# Altium PCB PCB1_1.pcbdoc (part 1 of 2)
Units mil, origin at the board's own origin, x right, y up, seen from the top; angles counter-clockwise.
Board outline 4397.5 x 3275 mil, 2 copper layers (Top Layer, Bottom Layer); 53 components, 83 nets, 273 pads, 69 vias.
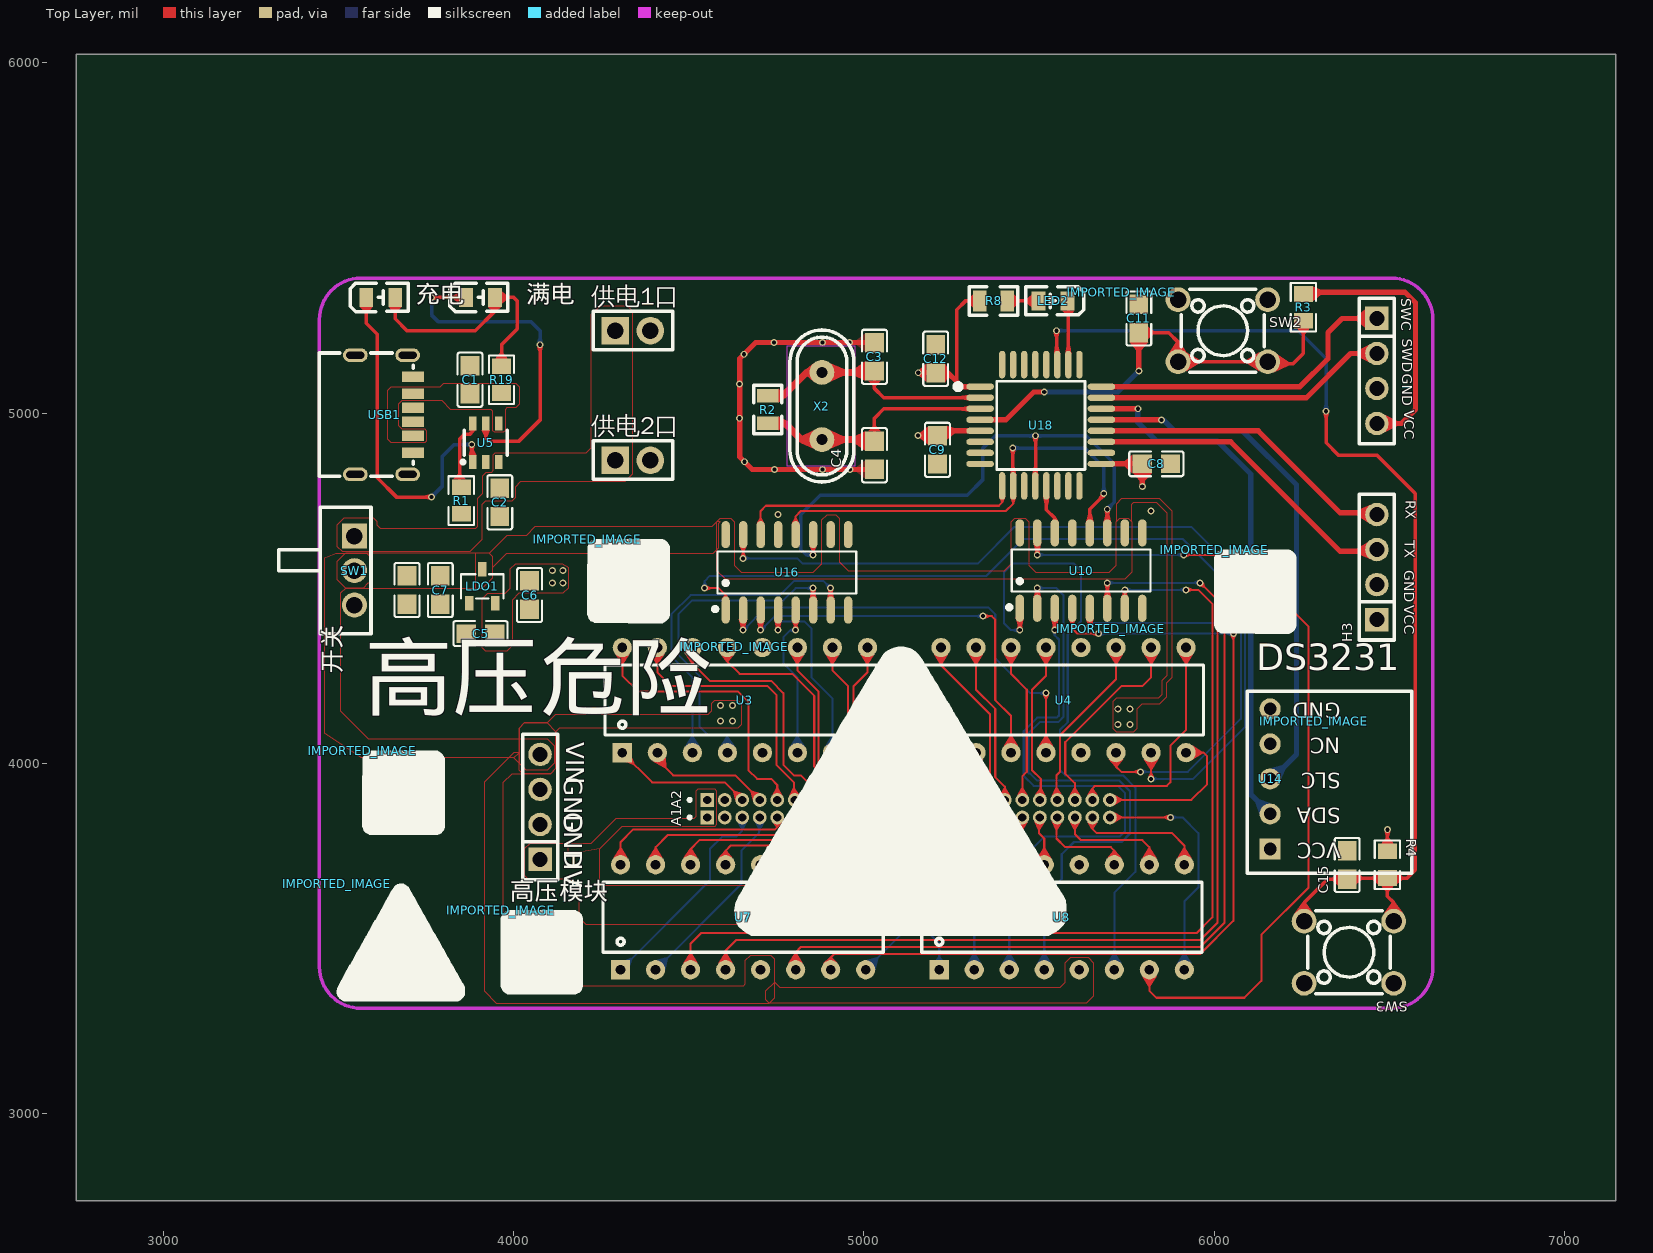
[diagram p0: Top Layer view]
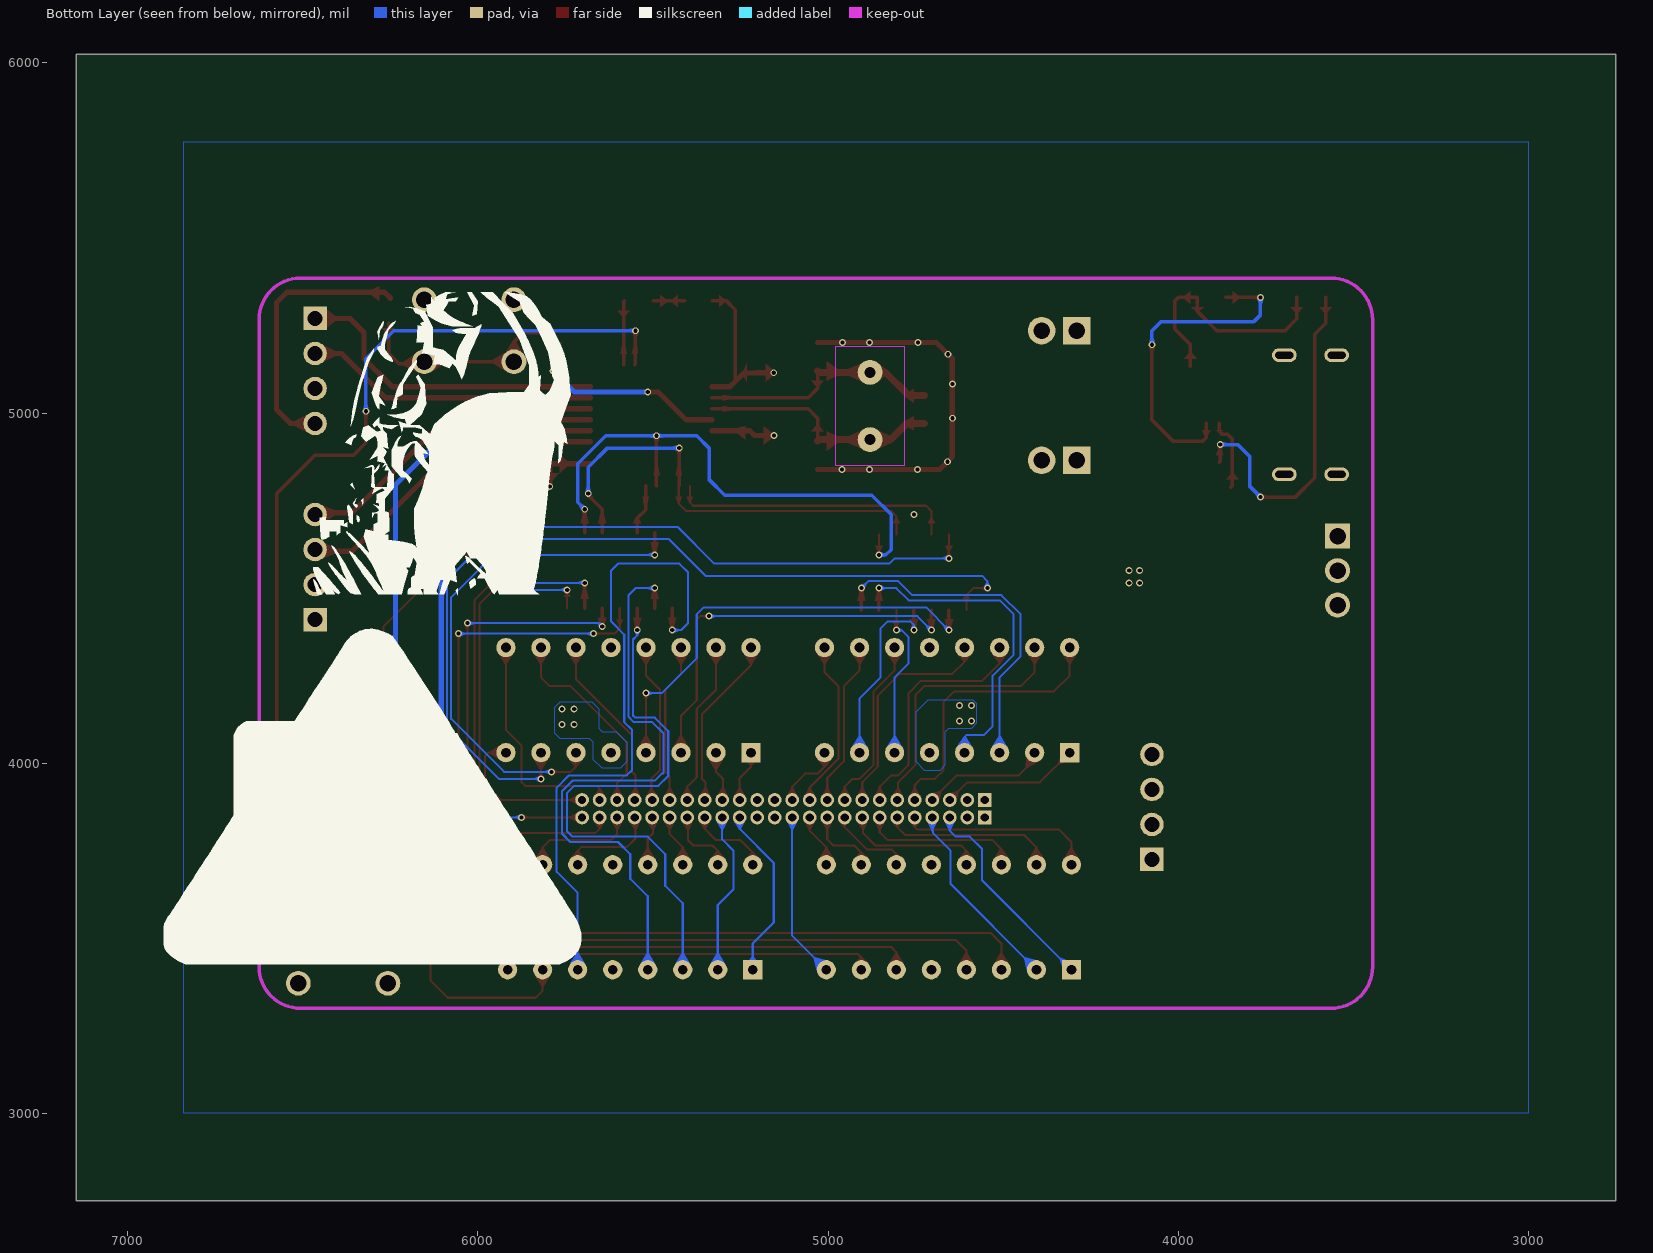
[diagram p1: Bottom Layer view, seen from below]

## Layer stack, top to bottom
Top Layer: signal copper (thickness not stored)
Dielectric: dielectric 12.6, FR-4, Dk 4.8
Bottom Layer: signal copper (thickness not stored)

## Board outline
7147.5,2750 2750,2750 2750,6025 7147.5,6025

## Components (designator, comment, footprint, x,y, rotation, side; value= is the part's Value field where it differs from the comment)
A1 "1.27*24Pin" 1.27*24PIN_MYSELF 4552.43,3845 r90 top
A2 "1.27*24Pin" 1.27*24PIN_MYSELF 4552.43,3895 r90 top
C1 "0805B106K100NT" C0805 3875,5095 r90 top
C2 "0805B106K100NT" C0805 3960,4745 r270 top
C3 "CC0805JRNPO9BN220" C0805 5030,5160.6 r270 top
C4 "CC0805JRNPO9BN220" C0805 5030,4879.4 r90 top
C5 "CC0805KKX5R8BB475" C0805 3905,4370 r0 top
C6 "TCC0805X7R104K250DTS" C0805 4045,4480 r90 top
C7 "TCC0805X7R104K250DTS" C0805 3790,4494.4 r90 top
C8 "GRM033C81E104KE14D" C0805 5835,4855 r0 top
C9 "GRM033C81E104KE14D" C0805 5210,4895 r270 top
C11 "100nF" C0805 5785,5270 r270 top
C12 "GRM033C81E104KE14D" C0805 5205,5155 r90 top
C15 "GRM033C81E104KE14D" C0805 6380,3709.4 r90 top
H3 "HDR-F_2.54_1x4P" HDR-TH_4P-P2.54-V-F 6465,4560 r90 top
IMPORTED_IMAGE "IMPORTED_IMAGE" IMPORTED_IMAGE 3495,3655 r0 top
IMPORTED_IMAGE "IMPORTED_IMAGE" IMPORTED_IMAGE 4629.57,4332.8 r0 top
IMPORTED_IMAGE "IMPORTED_IMAGE" IMPORTED_IMAGE 5704.46,4383.25 r0 top
IMPORTED_IMAGE "IMPORTED_IMAGE" IMPORTED_IMAGE 4210,4640 r0 top
IMPORTED_IMAGE "IMPORTED_IMAGE" IMPORTED_IMAGE 3567.5,4035 r0 top
IMPORTED_IMAGE "IMPORTED_IMAGE" IMPORTED_IMAGE 3962.5,3580 r0 top
IMPORTED_IMAGE "IMPORTED_IMAGE" IMPORTED_IMAGE 6285,4120 r0 top
IMPORTED_IMAGE "IMPORTED_IMAGE" IMPORTED_IMAGE 6000,4610 r0 top
IMPORTED_IMAGE "IMPORTED_IMAGE" IMPORTED_IMAGE 5735,5345 r0 top
LDO1 "ME6209A33M3G" SOT-23-3_L2.9-W1.6-P1.90-LS2.8-BR 3910,4505 r270 top
LED2 "D21121300350-LED0805" LED0805-R-RD 5540,5320 r180 top
R1 "RC0805FR-0724KL" R0805#1 3850,4750 r270 top
R2 "1MΩ" R0805#2 4725,5010 r90 top
R3 "RC0805FR-0724KL" R0805#1 6255,5302 r90 top
R4 "AR05DTCW1002" R0805#1 6495,3710 r270 top
R8 "1K" R0805#2 5370,5320 r180 top
R19 "RC0805FR-0724KL" R0805#1 3965,5095 r90 top
SW1 "={Manufacturer Part}" SW-TH_K3-1260D-K1 3545,4550 r0 top
SW2 "TC-6610F-5-260G" SW-TH_4P-L6.0-W6.0-P4.50-LS6.5 6025,5235 r0 top
SW3 "TC-6610F-5-260G" SW-TH_4P-L6.0-W6.0-P4.50-LS6.5 6385,3460 r180 top
SWC "HDR-F_2.54_1x4P" HDR-TH_4P-P2.54-V-F 6465,5120 r270 top
U3 "K155ID1/SN74141" DIP16 4310,4030 r0 top
U4 "K155ID1/SN74141" DIP16 5220,4030 r0 top
U5 "TP4059" SOT-23-6_L2.9-W1.6-P0.95-LS2.8-BR 3920,4915 r270 top
U7 "K155ID1/SN74141" DIP16 4305,3410 r0 top
U8 "K155ID1/SN74141" DIP16 5215,3410 r0 top
U10 "74HC595D,118" SOIC-16_L9.9-W3.9-P1.27-LS6.0-BL 5620,4550 r0 top
U14 "DS3231 5P" DS3231 6160,3955 r180 top
U16 "74HC595D,118" SOIC-16_L9.9-W3.9-P1.27-LS6.0-BL 4780,4545 r0 top
U18 "STM32F030K6T6" TQFP-32_L7.0-W7.0-P0.50-BL 5505,4965 r270 top
USB1 "TYPEC-250D-BCP6" USB-C-SMD_TYPEC-250D-BCP6 3630,4995 r270 top
X2 "8M" HC-49US_L11.0-W4.6-P4.88 4880,5020 r90 top
供电1口 "HDR-F_2.54_1x2P" HDR-TH_2P-P2.54-V-F 4340,5235 r0 top
供电2口 "HDR-F_2.54_1x2P" HDR-TH_2P-P2.54-V-F 4340,4865 r0 top
充电 "NCD0805G1" LED0805-R-RD 3620,5330 r0 top
开关 "CL21B106KOQNNNE" C0805 3695,4494.4 r90 top
满电 "NCD0805G1" LED0805-R-RD 3905,5330 r0 top
高压模块 "HDR-F_2.54_1x4P" HDR-TH_4P-P2.54-V-F 4075,3875 r90 top

## Footprints (in the part's own frame and the unit in brackets; to place one, negate y for a bottom-side part, rotate by r counter-clockwise, add the part's x,y. Pads: shape width x height; smd on the part's side, far side on the other; paste and mask are expansions set on the pad)
1.27*24PIN_MYSELF [mm]
  rect 1x1 hole 0.6: 1(0,0)
  round 1 hole 0.6: 2(0,-1.27) 3(0,-2.54) 4(0,-3.81) 5(0,-5.08) 6(0,-6.35) 7(0,-7.62) 8(0,-8.89) 9(0,-10.16) 10(0,-11.43) 11(0,-12.7) 12(0,-13.97) 13(0,-15.24) 14(0,-16.51) 15(0,-17.78) 16(0,-19.05) 17(0,-20.32) 18(0,-21.59) 19(0,-22.86) 20(0,-24.13) 21(0,-25.4) 22(0,-26.67) 23(0,-27.94) 24(0,-29.21)
  silkscreen extent -0.09,1.18 0.09,1.36
C0805 [mm]
  rect 1.41x1.35 smd: 1(-1.03,0) 2(1.03,0)
  silkscreen extent -1.96,-0.9 1.96,0.9
DIP16 [mil]
  rect 55x55 hole 28: 1(0,0)
  round 55 hole 28: 2(100,0) 3(200,0) 4(300,0) 5(400,0) 6(500,0) 7(600,0) 8(700,0) 9(700,300) 10(600,300) 11(500,300) 12(400,300) 13(300,300) 14(200,300) 15(100,300) 16(0,300)
  silkscreen extent -50,50 750,250
DS3231 [mil]
  rect 60x60 hole 36: 1(0,200)
  round 60 hole 36: 2(0,100) 3(0,0) 4(0,-100) 5(0,-200)
  silkscreen extent -405,-250 65,270
HC-49US_L11.0-W4.6-P4.88 [mm]
  round 1.8 hole 0.8: 1(-2.44,0) 2(2.44,0)
  silkscreen extent -5.51,-2.32 5.51,2.32
HDR-TH_2P-P2.54-V-F [mm]
  rect 2x2 hole 1.2: 1(-1.27,0)
  round 2 hole 1.2: 2(1.27,0)
  silkscreen extent -2.88,-1.39 2.88,1.4
HDR-TH_4P-P2.54-V-F [mm]
  rect 1.7x1.7 hole 1.1: 1(-3.81,0)
  round 1.7 hole 1.1: 2(-1.27,0) 3(1.27,0) 4(3.81,0)
  silkscreen extent -5.29,-1.27 5.29,1.27
IMPORTED_IMAGE [mil]
  silkscreen extent 0,-335 365,1
LED0805-R-RD [mm]
  rect 1x1.4 smd: 1(1.05,0) 2(-1.05,0)
  silkscreen extent -2.22,-1.04 1.99,1.01
R0805#1 [mil]
  rect 44.6x54.2 smd: 1(-38,0) 2(38,0)
  silkscreen extent -69,-36 69,36
R0805#2 [mil]
  rect 39.37x61.02 smd: 1(-39.37,0) 2(39.37,0)
  silkscreen extent -69,-40 69,40
SOIC-16_L9.9-W3.9-P1.27-LS6.0-BL [mil]
  oval 23.7x77.6 smd: 1(-175,-107.7) 2(-125,-107.7) 3(-75,-107.7) 4(-25,-107.7) 5(25,-107.7) 6(75,-107.7) 7(125,-107.7) 8(175,-107.7) 9(175,107.7) 10(125,107.7) 11(75,107.7) 12(25,107.7) 13(-25,107.7) 14(-75,107.7) 15(-125,107.7) 16(-175,107.7)
  silkscreen extent -211,-111 198,60
SOT-23-3_L2.9-W1.6-P1.90-LS2.8-BR [mm]
  rect 1.07x0.6 smd: 1(1.235,-0.95) 2(1.235,0.95) 3(-1.235,0)
  silkscreen extent -0.88,-1.54 0.88,1.54
SOT-23-6_L2.9-W1.6-P0.95-LS2.8-BR [mm]
  rect 1x0.55 smd: 1(1.4,-0.95) 2(1.4,0) 3(1.4,0.95) 4(-1.4,0.95) 5(-1.4,0) 6(-1.4,-0.95)
  silkscreen extent -0.9,-1.78 1.52,1.55
SW-TH_4P-L6.0-W6.0-P4.50-LS6.5 [mm]
  round 1.8 hole 1.2: 1(-3.25,2.25) 2(3.25,2.25) 3(-3.25,-2.25) 4(3.25,-2.25)
  silkscreen extent -3,-3 3,3
SW-TH_K3-1260D-K1 [mil]
  rect 70.9x70.9 hole 47.2: 1(0,98.4)
  round 70.9 hole 47.2: 2(0,0) 3(0,-98.4)
  silkscreen extent -216,-181 47,181
TQFP-32_L7.0-W7.0-P0.50-BL [mm]
  oval 0.45x2 smd: 1(-2.8,-4.4) 2(-2,-4.4) 3(-1.2,-4.4) 4(-0.4,-4.4) 5(0.4,-4.4) 6(1.2,-4.4) 7(2,-4.4) 8(2.8,-4.4) 17(2.8,4.4) 18(2,4.4) 19(1.2,4.4) 20(0.4,4.4) 21(-0.4,4.4) 22(-1.2,4.4) 23(-2,4.4) 24(-2.8,4.4)
  oval 2x0.45 smd: 9(4.4,-2.8) 10(4.4,-2) 11(4.4,-1.2) 12(4.4,-0.4) 13(4.4,0.4) 14(4.4,1.2) 15(4.4,2) 16(4.4,2.8) 25(-4.4,2.8) 26(-4.4,2) 27(-4.4,1.2) 28(-4.4,0.4) 29(-4.4,-0.4) 30(-4.4,-1.2) 31(-4.4,-2) 32(-4.4,-2.8)
  silkscreen extent -3.2,-6.2 3.2,3.2
USB-C-SMD_TYPEC-250D-BCP6 [mm]
  oval 1x1.8 hole 0.5 slot 1.3 at 90 deg: 1(-4.32,1.7) 2(-4.32,-2.1) 3(4.32,-2.1) 4(4.32,1.7)
  rect 0.75x1.6 smd: A5(-0.5,2.1) A9(1.52,2.1) A12(2.75,2.1) B5(0.5,2.1) B9(-1.52,2.1) B12(-2.75,2.1)
  silkscreen extent -4.48,-4.7 4.47,2.1

## Via types
v1: diameter 19.68, hole 11.81, Top Layer to Bottom Layer, 69 vias

## Nets (pads, with @x,y where several pads share a name; then routed paths per layer and width w, separated by ;. In a path a pad name is that pad's centre, name@x,y a point inside that pad or via, vN(x,y) a via of type N, cw(c..) or ccw(c..) an arc to the next point about the centre after c; other vN are vias at no path point)
1_0: A1.8 U7.13 | length 401.7
  Top Layer w6: U7.13@4605,3710 4605,3750 4620,3765 4865,3765 4900,3800 4900,3842.57 A1.8@4902.43,3845
1_1: A1.3 U7.1 | length 602.3
  Bottom Layer w6: U7.1@4305,3410 4560,3665 4560,3755 4595,3790 4635,3790 4652.43,3807.43 A1.3@4652.43,3845
1_2: A1.4 U7.2 | length 558.2
  Bottom Layer w6: U7.2@4405,3410 4650,3655 4650,3750 4700,3800 4700,3805 4702.43,3807.43 A1.4@4702.43,3845
1_3: A1.5 U7.16 | length 557.6
  Top Layer w6: U7.16@4305,3710 4305,3775 4340,3810 4745,3810 4752.43,3817.43 A1.5@4752.43,3845
1_4: A1.6 U7.15 | length 498.8
  Top Layer w6: U7.15@4405,3710 4405,3760 4440,3795 4780,3795 4802.43,3817.43 A1.6@4802.43,3845
1_5: A1.7 U7.14 | length 454.6
  Top Layer w6: U7.14@4505,3710 4505,3755 4530,3780 4830,3780 4852.43,3802.43 A1.7@4852.43,3845
1_6: A1.12 U7.8 | length 475.4
  Bottom Layer w6: U7.8@5005,3410 5102.43,3507.43 A1.12@5102.43,3845
1_7: A1.11 U7.9 | length 154.6
  Top Layer w6: U7.9@5005,3710 5005,3760 5052.43,3807.43 A1.11@5052.43,3845
1_8: A1.10 U7.10 | length 210.5
  Top Layer w6: U7.10@4905,3710 4905,3745 4925,3765 4985,3765 5002.43,3782.43 A1.10@5002.43,3845
1_9: A1.9 U7.11 | length 239.2
  Top Layer w6: U7.11@4805,3710 4805,3740 4818,3753 4888,3753 4955,3820 4955,3842.43 A1.9@4952.43,3845
1A: U7.3 U10.7 | length 2810.3
  Top Layer w6: U7.3@4505,3410 4505,3485 4535,3515 5950,3515 5995,3560 5995,4455 5955,4495 v1(5920,4495) ; U10.7@5745,4442.3 v1(5745,4495)
  Bottom Layer w6: v1(5745,4495) v1(5920,4495)
1B: U7.6 U10.5 | length 2606.7
  Top Layer w6: U7.6@4805,3410 4805,3460 4820,3475 5960,3475 6030,3545 v1(6030,4400)
  Top Layer w10: v1(5645,4390) U10.5@5645,4442.3
  Bottom Layer w6: v1(5645,4390) 5655,4400 v1(6030,4400)
1C: U7.7 U10.4 | length 2572
  Top Layer w6: U7.7@4905,3410 4905,3445 4915,3455 5960,3455 6055,3550 v1(6055,4370) ; U10.4@5595,4442.3 5595,4385 5610,4370 v1(5670,4370)
  Bottom Layer w6: v1(5670,4370) v1(6055,4370)
1D: U7.4 U10.6 | length 2821.5
  Top Layer w6: U7.4@4605,3410 4605,3465 4635,3495 5960,3495 6010,3545 6010,4465 v1(5960,4515) v1@5955,4515
  Top Layer w10: U10.6@5695,4442.3 v1(5695,4515)
  Bottom Layer w6: v1(5695,4515) v1@5955,4515
2_0: A1.20 U8.13 | length 142.2
  Top Layer w6: A1.20@5502.43,3845 5500,3842.57 5500,3800 5515,3785 U8.13@5515,3710
2_1: A1.15 U8.1 | length 500.2
  Bottom Layer w6: U8.1@5215,3410 5215,3485 5155,3545 5155,3715 5252.43,3812.43 A1.15@5252.43,3845
2_2: A1.16 U8.2 | length 467.1
  Bottom Layer w6: A1.16@5302.43,3845 5302.43,3782.43 5270,3750 5270,3640 5315,3595 U8.2@5315,3410
2_3: A1.17 U8.16 | length 232.9
  Top Layer w6: U8.16@5215,3710 5215,3745 5250,3780 5320,3780 5352.43,3812.43 A1.17@5352.43,3845
2_4: A1.18 U8.15 | length 203.4
  Top Layer w6: U8.15@5315,3710 5315,3750 5330,3765 5385,3765 5400,3780 5400,3842.57 A1.18@5402.43,3845
2_5: A1.19 U8.14 | length 150.5
  Top Layer w6: U8.14@5415,3710 5415,3760 5452.43,3797.43 A1.19@5452.43,3845
2_6: A1.24 U8.8 | length 677.8
  Top Layer w6: A1.24@5702.43,3845 v1(5875,3845)
  Bottom Layer w6: v1(5875,3845) 5910,3845 5955,3800 5955,3645 5915,3605 U8.8@5915,3410
2_7: A1.23 U8.9 | length 369.7
  Top Layer w6: A1.23@5652.43,3845 5652.43,3812.57 5665,3800 5880,3800 5915,3765 U8.9@5915,3710
2_8: A1.22 U8.10 | length 325.6
  Top Layer w6: A1.22@5602.43,3845 5602.43,3797.57 5620,3780 5795,3780 5815,3760 U8.10@5815,3710
2_9: A1.21 U8.11 | length 280.5
  Top Layer w6: A1.21@5552.43,3845 5550,3842.57 5550,3785 5575,3760 5705,3760 5715,3750 U8.11@5715,3710
2A: U8.3 U10.3 | length 1634.4
  Top Layer w10: v1(5545,4380) U10.3@5545,4442.3
  Bottom Layer w6: U8.3@5415,3410 5415,3600 5465,3650 5465,3740 5515,3790 5730,3790 5745,3805 5745,3915 5725,3935 5485,3935 5456.5,3963.5 5456.5,4091.5 5495,4130 5551,4130 5557,4136 5557,4353 5545,4365 v1(5545,4380)
2B: U8.6 U10.1 | length 1874.6
  Top Layer w10: v1(5445,4380) U10.1@5445,4442.3
  Bottom Layer w6: v1(5445,4380) 5420,4380 5400,4400 5400,4545 5425,4570 5600,4570 5620,4550 5620,4405 5582,4367 5582,4117 5560,4095 5560,3980 5575,3965 5740,3965 5775,3930 5775,3690 5715,3630 U8.6@5715,3410
2C: U8.7 U10.15 | length 2398.4
  Top Layer w6: U8.7@5815,3410 5815,3350 5835,3330 6086.41,3330 6135,3378.59 6135,3510 6270,3645 6270,4390 6065,4595 v1@5910,4595
  Top Layer w10: v1(5495,4595) U10.15@5495,4657.7
  Bottom Layer w6: v1(5495,4595) v1@5910,4595
  other v1: 5913.39,4595
2D: U8.4 U10.2 | length 1725.3
  Top Layer w10: U10.2@5495,4442.3 v1(5495,4500)
  Bottom Layer w6: v1(5495,4500) 5550,4500 5570,4480 5570,4132.03 5555.97,4118 5503,4118 5470,4085 5470,3970 5475,3970 5495,3950 5730,3950 5760,3920 5760,3799 5736,3775 5600,3775 5565,3740 5565,3670 5515,3620 U8.4@5515,3410
3_0: A2.8 U3.13 | length 644
  Top Layer w6: U3.13@4610,4330 4610,4290 4645,4255 4795,4255 4858,4192 4858,3990.03 4902.43,3945.6 A2.8@4902.43,3895
3_1: A2.3 U3.1 | length 398.3
  Top Layer w6: U3.1@4310,4030 4395,3945 4602.43,3945 A2.3@4652.43,3895
3_2: A2.4 U3.2 | length 360.1
  Top Layer w6: U3.2@4410,4030 4410,4010 4455,3965 4632.43,3965 A2.4@4702.43,3895
3_3: A2.5 U3.16 | length 808.6
  Top Layer w6: U3.16@4310,4330 4310,4250 4355,4205 4640,4205 4670,4175 4670,3980 4695,3955 4735,3955 4752.43,3937.57 A2.5@4752.43,3895
3_4: A2.6 U3.15 | length 758.6
  Top Layer w6: U3.15@4410,4330 4410,4260 4450,4220 4725,4220 4750,4195 4750,3995 4800,3945 4800,3897.43 A2.6@4802.43,3895
3_5: A2.7 U3.14 | length 691.1
  Top Layer w6: U3.14@4510,4330 4510,4285 4560,4235 4735,4235 4770,4200 4770,3995 4800,3965 4820,3965 4852.43,3932.57 A2.7@4852.43,3895
3_6: A2.12 U3.8 | length 193.8
  Top Layer w6: U3.8@5010,4030 5010,3990 5030,3970 5065,3970 5102.43,3932.57 A2.12@5102.43,3895
3_7: A2.11 U3.9 | length 485.7
  Top Layer w6: U3.9@5010,4330 5010,4260 4970,4220 4970,4013.03 5052.43,3930.6 A2.11@5052.43,3895
3_8: A2.10 U3.10 | length 473.3
  Top Layer w6: U3.10@4910,4330 4910,4265 4955,4220 4955,4005 5002.43,3957.57 A2.10@5002.43,3895
3_9: A2.9 U3.11 | length 505.7
  Top Layer w6: U3.11@4810,4330 4810,4265 4870,4205 4870,3995 4910,3955 4930,3955 4952.43,3932.57 A2.9@4952.43,3895
3A: U3.3 U16.7 | length 985.2
  Top Layer w10: U16.7@4905,4437.3 v1(4905,4500)
  Bottom Layer w6: U3.3@4510,4030 4510,4245 4450,4305 4450,4425 4505,4480 4760,4480 4800,4520 4885,4520 v1(4905,4500)
3B: U3.6 U16.5 | length 447.2
  Top Layer w6: v1(4805,4380) U16.5@4805,4437.3
  Bottom Layer w6: v1(4805,4380) 4790,4380 4770,4360 4770,4285 4810,4245 U3.6@4810,4030
3C: U3.7 U16.4 | length 559.6
  Top Layer w10: v1(4755,4380) U16.4@4755,4437.3
  Bottom Layer w6: v1(4755,4380) 4755,4395 4765,4405 4830,4405 4850,4385 4850,4245 4910,4185 U3.7@4910,4030
3D: U3.4 U16.6 | length 961
  Top Layer w10: U16.6@4855,4437.3 v1(4855,4500)
  Bottom Layer w6: U3.4@4610,4030 4610,4075 4605,4080 4555,4080 4530,4105 4530,4250 4470,4310 4470,4425 4510,4465 4770,4465 4805,4500 v1(4855,4500)
4_0: A2.20 U4.13 | length 463
  Top Layer w6: A2.20@5502.43,3895 5505,3897.57 5505,3955 5480,3980 5480,4210 5520,4250 U4.13@5520,4330
4_1: A2.15 U4.1 | length 148.4
  Top Layer w6: U4.1@5220,4030 5220,3990 5252.43,3957.57 A2.15@5252.43,3895
4_2: A2.16 U4.2 | length 144.3
  Top Layer w6: A2.16@5302.43,3895 5300,3897.43 5300,3955 5320,3975 U4.2@5320,4030
4_3: A2.17 U4.16 | length 498.1
  Top Layer w6: U4.16@5220,4330 5220,4280 5360,4140 5360,3955 5350,3945 5350,3897.43 A2.17@5352.43,3895
4_4: A2.18 U4.15 | length 469.1
  Top Layer w6: U4.15@5320,4330 5320,4210 5375,4155 5375,3960 5402.43,3932.57 A2.18@5402.43,3895
4_5: A2.19 U4.14 | length 458.8
  Top Layer w6: U4.14@5420,4330 5420,4255 5465,4210 5465,3975 5452.43,3962.43 A2.19@5452.43,3895
4_6: A2.24 U4.8 | length 440.4
  Top Layer w6: A2.24@5702.43,3895 5935,3895 5980,3940 5980,4020 5970,4030 U4.8@5920,4030
4_7: A2.23 U4.9 | length 665.9
  Top Layer w6: A2.23@5652.43,3895 5652.43,3927.43 5660,3935 5865,3935 5875,3945 5875,4050 5920,4095 U4.9@5920,4330
4_8: A2.22 U4.10 | length 583
  Top Layer w6: A2.22@5602.43,3895 5602.43,3942.57 5575,3970 5575,4060 5735,4220 5795,4220 5820,4245 U4.10@5820,4330
4_9: A2.21 U4.11 | length 506.4
  Top Layer w6: A2.21@5552.43,3895 5550,3897.43 5550,3965 5560,3975 5560,4080 5720,4240 U4.11@5720,4330
4A: U4.3 U16.3 | length 1146.7
  Top Layer w6: v1(5340,4420) 5365,4420 5375,4410 5375,4180 5420,4135 U4.3@5420,4030
  Top Layer w10: v1(4705,4380) U16.3@4705,4437.3
  Bottom Layer w6: v1(4705,4380) 4745,4420 v1(5340,4420)
4B: U4.6 U16.1 | length 2593.6
  Top Layer w6: v1(4545,4500) 4585,4500 4605,4480 U16.1@4605,4437.3 ; U4.6@5720,4030 5720,3990 5735,3975 v1(5790,3975)
  Bottom Layer w6: v1(4545,4500) 4545,4520 4560,4535 5350,4535 5455,4640 5910,4640 6076.5,4473.5 6076.5,4126.5 5925,3975 v1(5790,3975)
4C: U4.7 U16.15 | length 2437.5
  Top Layer w6: v1(4655,4585) U16.15@4655,4652.7 ; v1(5820,3955) U4.7@5820,4030
  Bottom Layer w6: v1(4655,4585) 4810,4585 4825,4570 5325,4570 5430,4675 5935,4675 6088.5,4521.5 6088.5,4103.5 5940,3955 v1(5820,3955)
4D: U4.4 U16.2 | length 1293.9
  Top Layer w6: U4.4@5520,4030 v1(5520,4200)
  Top Layer w10: v1(4655,4380) U16.2@4655,4437.3
  Bottom Layer w6: v1(4655,4380) 4720,4445 5355,4445 5375,4425 5375,4300 5475,4200 v1(5520,4200)
$1N3546: LED2.1 R8.1 | length 89.3
  Top Layer w10: R8.1@5409.37,5320 LED2.1@5498.65,5320
$1N5238: C2.1 SW1.1 U5.3 供电1口.1 供电2口.1
$1N5239: R1.1 U5.6 | length 208.6
  Top Layer w10: R1.1@3850,4788 3845,4793 3845,4925 3860,4940 3875,4940 3882.6,4947.6 U5.6@3882.6,4970.12
$1N5242: U5.5 满电.2 | length 956.4
  Top Layer w10: v1(3765,5330) 满电.2@3863.65,5330 ; U5.5@3920,4970.12 3920,4930 3930,4920 4015,4920 4075,4980 v1(4075,5195)
  Bottom Layer w10: v1(3765,5330) 3765,5280 3785,5260 4050,5260 4075,5235 v1(4075,5195)
$1N5243: R19.2 充电.1 满电.1 | length 695.7
  Top Layer w10: 充电.1@3661.35,5330 3661.35,5268.65 3695,5235 3890,5235 3945,5290 3945,5328.65 满电.1@3946.35,5330 4000,5330 4010,5320 4010,5240 3965,5195 R19.2@3965,5133
$1N5248: U5.1 充电.2 | length 983.9
  Top Layer w10: 充电.2@3578.65,5330 3578.65,5256.35 3610,5225 3610,4815 3665,4760 v1(3765,4760) ; v1(3880,4910) 3880,4862.49 U5.1@3882.6,4859.89
  Bottom Layer w10: v1(3765,4760) 3795,4790 3795,4875 3830,4910 v1(3880,4910)
+5V: C7.2 LDO1.3 SW1.2 U3.5 U4.5 U7.5 U8.5 U10.10 U10.16 U16.10 U16.16 开关.2 高压模块.4
  other v1: 5725,4110 5760,4110 4590,4120 4625,4120 5725,4155 5760,4155 4590,4165 4625,4165
APA3/SER2: U16.14 U18.9 | length 814.3
  Top Layer w6: U16.14@4705,4652.7 4705,4720 4720,4735 5385,4735 5394.76,4744.76 U18.9@5394.76,4791.77
APA4/SHCP: U10.11 U16.11 U18.12 | length 1622.1
  Top Layer w6: v1(4855,4595) U16.11@4855,4652.7
  Top Layer w10: U18.12@5489.25,4791.77 5490,4792.52 v1@5490,4935 ; U10.11@5695,4657.7 v1(5695,4725)
  Bottom Layer w10: v1(4855,4595) 4835,4595 4820,4610 4820,4710 4875,4765 5295,4765 5340,4810 5340,4900 5375,4935 v1(5489.5,4935) 5635,4935 5715,4855 5715,4745 v1(5695,4725)
APA6/STCP: U10.12 U16.12 U18.10 | length 1334.5
  Top Layer w6: U16.12@4805,4652.7 4805,4705 4820,4720 5405,4720 5426.26,4741.26 U18.10@5426.26,4791.77
  Top Layer w10: v1(5425,4900) 5425,4793.03 U18.10@5426.26,4791.77 ; U10.12@5645,4657.7 5645,4725 5685,4765 v1(5685,4770)
  Bottom Layer w10: v1(5425,4900) 5630,4900 5685,4845 v1(5685,4770)
APA7/SER1: U10.14 U18.13 | length 144.1
  Top Layer w10: U18.13@5520.75,4791.77 5520.75,4724.25 5545,4700 U10.14@5545,4657.7
GND: A1.2 A1.13 A2.2 A2.13 C1.2 C2.2 C3.1 C4.1 C5.1 C6.1 C7.1 C8.2 C9.2 C11.1 C12.2 C15.2 H3.2 LDO1.1 R1.2 SW2.1 SW2.2 SW3.1 SW3.2 SWC.3 U3.12 U4.12 U5.2 U7.12 U8.12 U10.8 U10.13 U14.5 U16.8 U16.13 U18.16 U18.32 USB1.1 USB1.2 USB1.3 USB1.4 USB1.A12 USB1.B12 供电1口.2 供电2口.2 开关.1 高压模块.2 高压模块.3 | length 1084
  Top Layer w15: C4.1@5030,4838.9 v1(4959.75,4838.9) v1(4881.92,4838.9) v1(4744.17,4838.9) 4681.1,4838.9 v1(4659.07,4860.93) 4645,4875 v1(4645,4985) v1(4645,5083) 4645,5155 v1(4657.81,5167.81) 4691.1,5201.1 v1(4743.39,5201.1) v1(4881.14,5201.1) v1(4958.97,5201.1) C3.1@5030,5201.1
  other v1: 4755,4710 5820,4720
HV: A1.1 A1.14 A2.1 A2.14 高压模块.1
PA9/TX: H3.3 U18.19 | length 918.4
  Top Layer w15: U18.19@5678.23,4917.76 6047.24,4917.76 6360,4605 6460,4605 H3.3@6465,4610
PA10/RX: H3.4 U18.20 | length 885.9
  Top Layer w15: U18.20@5678.23,4949.25 6125.75,4949.25 6360,4715 6460,4715 H3.4@6465,4710
PA11/SCL: U14.3 U18.21 | length 1509.8
  Top Layer w15: U18.21@5678.23,4980.75 5849.25,4980.75 v1(5850,4980)
  Bottom Layer w15: v1(5850,4980) 5855,4980 5885,4950 6080,4950 6235,4795 6235,4025 U14.3@6160,3950
PA12/SDA: U14.2 U18.22 | length 1520.2
  Top Layer w15: U18.22@5678.23,5012.24 v1(5782.24,5012.24)
  Bottom Layer w15: v1(5782.24,5012.24) 5782.24,4972.76 5835,4920 6010,4920 6105,4825 6105,3910 U14.2@6160,3855
PA13/SWD: SWC.2 U18.23 | length 839.1
  Top Layer w15: U18.23@5678.23,5043.74 6263.74,5043.74 6390,5170 SWC.2@6465,5170
PA14/SWC: SWC.1 U18.24 | length 911.4
  Top Layer w15: U18.24@5678.23,5075.24 6245.24,5075.24 6325,5155 6325,5230 6365,5270 SWC.1@6465,5270
PB3/LED: LED2.2 U18.26 | length 182.8
  Top Layer w10: LED2.2@5581.35,5320 5583.74,5317.61 U18.26@5583.74,5138.23
PB4: C15.1 R4.2 SW3.3 SW3.4 U18.27 | length 3071.7
  Top Layer w10: v1(5550,5235) 5550,5140.47 U18.27@5552.24,5138.23 ; SW3.4@6257.05,3548.58 6257.05,3602.05 6323.9,3668.9 6380,3668.9 6383.1,3672 R4.2@6495,3672 ; v1(6320,5005) 6320,4915 6355,4880 6465,4880 6575,4770 6575,3695 6552,3672 R4.2@6495,3672 ; SW3.3@6512.95,3548.58 6512.95,3602.05 6495,3620 R4.2@6495,3672
  Bottom Layer w10: v1(5550,5235) 6240,5235 6320,5155 v1(6320,5005)
PF0: C3.2 R2.2 U18.2 X2.2 | length 696.9
  Top Layer w10: C3.2@5030,5120.05 5030,5070 5056.26,5043.74 U18.2@5331.77,5043.74
  Top Layer w20: R2.2@4725,5049.37 4769.37,5049.37 4836.06,5116.06 X2.2@4880,5116.06 5026.06,5116.06 C3.2@5030,5120.05
PF1: C4.2 R2.1 U18.3 X2.1 | length 704.1
  Top Layer w10: C4.2@5030,4919.95 5030,4985 5057,5012 5331.67,5012 5331.77,5012.1 U18.3@5331.77,5012.24
  Top Layer w20: R2.1@4725,4970.63 4774.37,4970.63 4821.06,4923.94 X2.1@4880,4923.94 5026.06,4923.94 C4.2@5030,4919.95
RST: C11.2 R3.1 SW2.3 SW2.4 U18.4 | length 1262.4
  Top Layer w10: C11.2@5785,5229.45 5870.55,5229.45 5897.05,5202.95 SW2.3@5897.05,5152.44 ; SW2.3@5897.05,5146.42 SW2.3@5897.05,5152.44 ; R3.1@6255,5257 6255,5170 6225,5140 6159.37,5140 6152.95,5146.42 5903.07,5146.42 SW2.3@5897.05,5152.44
  Top Layer w15: U18.4@5331.77,4980.75 5405.75,4980.75 5485,5060 v1(5515,5060) ; v1(5785,5120) C11.2@5785,5229.45
  Bottom Layer w15: v1(5515,5060) 5725,5060 v1(5785,5120)
VCC: C5.2 C6.2 C8.1 C9.1 C12.1 H3.1 LDO1.2 R3.2 R4.1 R8.2 SWC.4 U14.1 U18.1 U18.5 U18.17 | length 1677.2
  Top Layer w10: 5265,5090 5265,5295 5290,5320 R8.2@5330.63,5320 ; R4.1@6495,3748 v1(6495,3810)
  Top Layer w15: v1(5154.11,4935.5) 5210,4935.5 5223.75,4949.25 U18.5@5331.77,4949.25 ; v1(5155,5115) 5204.5,5115 5205,5114.5 5240.5,5114.5 5265,5090 5279.76,5075.24 U18.1@5331.77,5075.24 ; U18.17@5678.23,4854.76 5794.26,4854.76 5794.5,4855 5795,4854.5 v1(5795,4790) ; R3.2@6250,5328 6267,5345 6545,5345 6575,5315 6575,5010 6535,4970 SWC.4@6465,4970
  other v1: 4110,4515 4140,4515 4110,4550 4140,4550
VCC5V: C1.1 R19.1 U5.4 USB1.A9 USB1.B9
"": SW1.3 U10.9 U14.4 U16.9 U18.6 U18.7 U18.8 U18.11 U18.14 U18.15 U18.18 U18.25 U18.28 U18.29 U18.30 U18.31 USB1.A5 USB1.B5

## Polygon pours and split planes (outlines as drawn)
GND on Top Layer (solid, remove dead copper, pour order 23): 3225,3190 6715,3190 6715,5605 3225,5605
GND on Bottom Layer (solid, remove dead copper, pour order 24): 3000,3000 6840,3000 6840,5775 3000,5775
GND on Inner1 (split plane): 4390,4870 4439.57,4870 4439.57,4860 4390,4860
GND on Inner1 (split plane): 4385,4865 4385,4914.57 4395,4914.57 4395,4865
GND on Inner1 (split plane): 4395,4865 4395,4815.43 4385,4815.43 4385,4865
GND on Inner1 (split plane): 4390,5240 4439.57,5240 4439.57,5230 4390,5230
GND on Inner1 (split plane): 4385,5235 4385,5284.57 4395,5284.57 4395,5235
GND on Inner1 (split plane): 4395,5235 4395,5185.43 4385,5185.43 4385,5235
GND on Inner1 (split plane): 6460,5070 6460,5113.66 6470,5113.66 6470,5070
GND on Inner1 (split plane): 6470,5070 6470,5026.34 6460,5026.34 6460,5070
GND on Inner1 (split plane): 6465,5075 6508.66,5075 6508.66,5065 6465,5065
GND on Inner1 (split plane): 6421.34,5075 6465,5075 6465,5065 6421.34,5065
GND on Inner1 (split plane): 6470,4510 6470,4466.34 6460,4466.34 6460,4510
GND on Inner1 (split plane): 6460,4510 6460,4553.66 6470,4553.66 6470,4510
GND on Inner1 (split plane): 6421.34,4515 6465,4515 6465,4505 6421.34,4505
GND on Inner1 (split plane): 6465,4515 6508.66,4515 6508.66,4505 6465,4505
GND on Inner1 (split plane): 4080,3925 4080,3881.34 4070,3881.34 4070,3925
GND on Inner1 (split plane): 4070,3925 4070,3968.66 4080,3968.66 4080,3925
GND on Inner1 (split plane): 4031.34,3930 4075,3930 4075,3920 4031.34,3920
GND on Inner1 (split plane): 4075,3930 4118.66,3930 4118.66,3920 4075,3920
GND on Inner1 (split plane): 5577.3,3715 5615,3715 5615,3705 5577.3,3705
GND on Inner1 (split plane): 5615,3715 5652.7,3715 5652.7,3705 5615,3705
GND on Inner1 (split plane): 5610,3710 5610,3747.7 5620,3747.7 5620,3710
GND on Inner1 (split plane): 5620,3710 5620,3672.3 5610,3672.3 5610,3710
GND on Inner1 (split plane): 6107.32,5328.58 6152.95,5328.58 6152.95,5318.58 6107.32,5318.58
GND on Inner1 (split plane): 6152.95,5328.58 6198.58,5328.58 6198.58,5318.58 6152.95,5318.58
GND on Inner1 (split plane): 6157.95,5323.58 6157.95,5277.95 6147.95,5277.95 6147.95,5323.58
GND on Inner1 (split plane): 5851.42,5328.58 5897.05,5328.58 5897.05,5318.58 5851.42,5318.58
GND on Inner1 (split plane): 5897.05,5328.58 5942.68,5328.58 5942.68,5318.58 5897.05,5318.58
GND on Inner1 (split plane): 5902.05,5323.58 5902.05,5277.95 5892.05,5277.95 5892.05,5323.58
GND on Inner1 (split plane): 4080,3825 4080,3781.34 4070,3781.34 4070,3825
GND on Inner1 (split plane): 4070,3825 4070,3868.66 4080,3868.66 4080,3825
GND on Inner1 (split plane): 4031.34,3830 4075,3830 4075,3820 4031.34,3820
GND on Inner1 (split plane): 4075,3830 4118.66,3830 4118.66,3820 4075,3820
GND on Inner1 (split plane): 4597.43,3895 4597.43,3924.89 4607.43,3924.89 4607.43,3895
GND on Inner1 (split plane): 6257.05,3376.42 6302.68,3376.42 6302.68,3366.42 6257.05,3366.42
GND on Inner1 (split plane): 6211.42,3376.42 6257.05,3376.42 6257.05,3366.42 6211.42,3366.42
GND on Inner1 (split plane): 6262.05,3371.42 6262.05,3325.79 6252.05,3325.79 6252.05,3371.42
GND on Inner1 (split plane): 6252.05,3371.42 6252.05,3417.05 6262.05,3417.05 6262.05,3371.42
GND on Inner1 (split plane): 4607.43,3845 4607.43,3815.11 4597.43,3815.11 4597.43,3845
GND on Inner1 (split plane): 6160,4160 6200.2,4160 6200.2,4150 6160,4150
GND on Inner1 (split plane): 6119.8,4160 6160,4160 6160,4150 6119.8,4150
GND on Inner1 (split plane): 6165,4155 6165,4114.8 6155,4114.8 6155,4155
GND on Inner1 (split plane): 6155,4155 6155,4195.2 6165,4195.2 6165,4155
GND on Inner1 (split plane): 5147.43,3895 5147.43,3924.89 5157.43,3924.89 5157.43,3895
GND on Inner1 (split plane): 4672.3,4335 4710,4335 4710,4325 4672.3,4325
GND on Inner1 (split plane): 4710,4335 4747.7,4335 4747.7,4325 4710,4325
GND on Inner1 (split plane): 4715,4330 4715,4292.3 4705,4292.3 4705,4330
GND on Inner1 (split plane): 5157.43,3845 5157.43,3815.11 5147.43,3815.11 5147.43,3845
GND on Inner1 (split plane): 4667.3,3715 4705,3715 4705,3705 4667.3,3705
GND on Inner1 (split plane): 4705,3715 4742.7,3715 4742.7,3705 4705,3705
GND on Inner1 (split plane): 4700,3710 4700,3747.7 4710,3747.7 4710,3710
GND on Inner1 (split plane): 4710,3710 4710,3672.3 4700,3672.3 4700,3710
GND on Inner1 (split plane): 3691.93,5165.08 3691.93,5194.97 3701.93,5194.97 3701.93,5165.08
GND on Inner1 (split plane): 3701.93,5165.08 3701.93,5135.19 3691.93,5135.19 3691.93,5165.08
GND on Inner1 (split plane): 3696.93,5170.08 3742.57,5170.08 3742.57,5160.08 3696.93,5160.08
GND on Inner1 (split plane): 3651.3,5170.08 3696.93,5170.08 3696.93,5160.08 3651.3,5160.08
GND on Inner1 (split plane): 5582.3,4335 5620,4335 5620,4325 5582.3,4325
GND on Inner1 (split plane): 5620,4335 5657.7,4335 5657.7,4325 5620,4325
GND on Inner1 (split plane): 5615,4330 5615,4367.7 5625,4367.7 5625,4330
GND on Inner1 (split plane): 5625,4330 5625,4292.3 5615,4292.3 5615,4330
GND on Inner1 (split plane): 3542.32,4824.92 3542.32,4854.81 3552.32,4854.81 3552.32,4824.92
GND on Inner1 (split plane): 3552.32,4824.92 3552.32,4795.03 3542.32,4795.03 3542.32,4824.92
GND on Inner1 (split plane): 3547.32,4829.92 3592.96,4829.92 3592.96,4819.92 3547.32,4819.92
GND on Inner1 (split plane): 3501.69,4829.92 3547.32,4829.92 3547.32,4819.92 3501.69,4819.92
GND on Inner1 (split plane): 3691.93,4824.92 3691.93,4854.81 3701.93,4854.81 3701.93,4824.92
GND on Inner1 (split plane): 3701.93,4824.92 3701.93,4795.03 3691.93,4795.03 3691.93,4824.92
GND on Inner1 (split plane): 3696.93,4829.92 3742.57,4829.92 3742.57,4819.92 3696.93,4819.92
GND on Inner1 (split plane): 3651.3,4829.92 3696.93,4829.92 3696.93,4819.92 3651.3,4819.92
GND on Inner1 (split plane): 3542.32,5165.08 3542.32,5194.97 3552.32,5194.97 3552.32,5165.08
GND on Inner1 (split plane): 3552.32,5165.08 3552.32,5135.19 3542.32,5135.19 3542.32,5165.08
GND on Inner1 (split plane): 3547.32,5170.08 3592.96,5170.08 3592.96,5160.08 3547.32,5160.08
GND on Inner1 (split plane): 3501.69,5170.08 3547.32,5170.08 3547.32,5160.08 3501.69,5160.08
GND on Inner1 (split plane): 6512.95,3376.42 6558.58,3376.42 6558.58,3366.42 6512.95,3366.42
GND on Inner1 (split plane): 6467.32,3376.42 6512.95,3376.42 6512.95,3366.42 6467.32,3366.42
GND on Inner1 (split plane): 6517.95,3371.42 6517.95,3325.79 6507.95,3325.79 6507.95,3371.42
GND on Inner1 (split plane): 6507.95,3371.42 6507.95,3417.05 6517.95,3417.05 6517.95,3371.42
VCC on Inner2 (split plane): 6155,3755 6155,3795.2 6165,3795.2 6165,3755
VCC on Inner2 (split plane): 6165,3755 6165,3714.8 6155,3714.8 6155,3755
VCC on Inner2 (split plane): 6119.8,3760 6160,3760 6160,3750 6119.8,3750
VCC on Inner2 (split plane): 6160,3760 6200.2,3760 6200.2,3750 6160,3750
VCC on Inner2 (split plane): 6465,4415 6508.66,4415 6508.66,4405 6465,4405
VCC on Inner2 (split plane): 6421.34,4415 6465,4415 6465,4405 6421.34,4405
VCC on Inner2 (split plane): 6460,4410 6460,4453.66 6470,4453.66 6470,4410
VCC on Inner2 (split plane): 6470,4410 6470,4366.34 6460,4366.34 6460,4410
VCC on Inner2 (split plane): 6421.34,4975 6465,4975 6465,4965 6421.34,4965
VCC on Inner2 (split plane): 6465,4975 6508.66,4975 6508.66,4965 6465,4965
VCC on Inner2 (split plane): 6470,4970 6470,4926.34 6460,4926.34 6460,4970
VCC on Inner2 (split plane): 6460,4970 6460,5013.66 6470,5013.66 6470,4970
+5V on Top Layer (solid, remove dead copper, pour order 5): 3515,4595 3495,4575 3495,4525 3520,4500 3910,4500 3940,4530 3940,4590 3930,4600 3520,4600
VCC on Top Layer (solid, remove dead copper, pour order 6): 4013.88,4484.81 3995,4465.93 3995,4335 3980,4320 3920,4320 3910,4330 3910,4470 3925,4485 3975,4485 3990,4500 3990,4555 4005,4570 4138.33,4570 4155,4560 4155,4500 4139.81,4484.81
$1N5238 on Top Layer (solid, remove dead copper, pour order 7): 3515,4700 3495,4680 3495,4620 3510,4605 3875,4605 3910,4640 3910,4740 3920,4750 3995,4750 4005,4760 4005,4790 4020,4805 4317.78,4805 4340,4827.22 4340,5290 4325,5305 4245,5305 4220,5280 4220,4900 4205,4885 3945,4885 3940,4880 3940,4835 3935,4830 3920,4830 3910,4820 3910,4770 3895,4755 3895,4675 3890,4670 3620,4670 3610,4680 3610,4690 3600,4700
VCC5V on Top Layer (solid, remove dead copper, pour order 8): 3745,4955 3750,4950 3750,4920 3745,4915 3650,4915 3640,4925 3640,5065 3650,5075 3790,5075 3800,5085 4005,5085 4015,5075 4015,5025 4005,5015 3980,5015 3975,5010 3975,4950 3970,4945 3945,4945 3940,4950 3940,5005 3935,5010 3820,5010 3795,5035 3680,5035 3670,5025 3670,4965 3680,4955
+5V on Top Layer (solid, remove dead copper, pour order 9): 4095,4070 4115,4050 4115,4000 4095,3980 4035,3980 4000,4015 3565,4015 3460,4085 3460,4587.08 3491,4600 3580,4600 3592.2,4587.8 3592.2,4513.2 3583.2,4513.2 3570,4500 3520,4500 3505,4485 3505,4150 3585,4070
+5V on Top Layer (solid, remove dead copper, pour order 11): 4580,4690 4590,4700 4620,4700 4630,4690 4630,4565 4650,4545 4855,4545 4880,4570 4880,4695 4895,4710 4920,4710 4930,4700 4930,4575 4955,4550 5400,4550 5420,4570 5420,4690 5430,4700 5460,4700 5470,4690 5470,4565 5490,4545 5700,4545 5720,4565 5720,4690 5730,4700 5755,4700 5765,4690 5765,4545 5745,4525 4605,4525 4580,4550
+5V on Bottom Layer (solid, remove dead copper, pour order 12): 4615.43,4180 4715,4180 4750,4145 4750,4005 4725,3980 4680,3980 4665,3995 4665,4090 4655,4100 4590,4100 4575,4115 4575,4170 4585,4180
HV on Top Layer (solid, remove dead copper, pour order 13): 4045,3770 4030,3755 4030,3680 4040,3670 4161.37,3670 4185,3646.37 4185,3560 4205,3540 5134.58,3540 5155,3560.42 5155,3735 5225,3805 5225,3920 5215,3930 5190,3930 5180,3920 5180,3800 5110,3730 5095,3730 5085,3720 5085,3665 5070,3650 4245,3650 4245,3755 4310,3820 4575,3820 4580,3825 4580,3920 4575,3925 4525,3925 4520,3920 4520,3847.49 4514.28,3841.77 4514.28,3841.46 4291.46,3841.46 4220,3770
+5V on Top Layer (solid, remove dead copper, pour order 14): 4639.33,4180 4650,4169.33 4650,4110 4640,4100 4130,4100 4120,4090 4120,3985 4105,3970 4025,3970 4015,3980 4015,4100 4030,4115 4095,4115 4120,4140 4555,4140 4565,4150 4565,4171.71 4573.29,4180
+5V on Top Layer (solid, remove dead copper, pour order 15): 3915,3945 3915,3350 3950,3315 4730,3315 4745,3330 4745,3440 4735,3450 4675,3450 4660,3435 4660,3368.37 4655,3363.37 3996.63,3363.37 3970,3390 3970,3945 3995,3970 4105,3970 4120,3985 4120,4090 4095,4115 4030,4115 4015,4100 4015,4030 4000,4030
+5V on Top Layer (solid, remove dead copper, pour order 16): 4015,4030 4015,4000 4000,4015
HV on Top Layer (solid, remove dead copper, pour order 18): 5225,3920 5215,3930 5190,3930 5180,3920 5180,3800 5110,3730 5095,3730 5085,3720 5085,3665 5070,3650 4245,3650 4245,3755 4155,3740 4155,3765 4150,3770 4045,3770 4030,3755 4030,3680 4040,3670 4161.37,3670 4185,3646.37 4185,3560 4205,3540 5134.58,3540 5155,3560.42 5155,3735 5225,3805
+5V on Top Layer (solid, remove dead copper, pour order 19): 3890,4600 3890,4500 3909.19,4500 3910,4499.19 3940,4529.19 3940,4560 3980,4600 4570,4600 4585,4615 4585,4685 4590,4690 4580,4690 4565,4675 4060,4675 4035,4650 3980,4650 3930,4600
+5V on Top Layer (solid, remove dead copper, pour order 20): 4745,3375 4760,3360 5560,3360 5575,3375 5575,3430 5590,3445 5640,3445 5655,3430 5655,3335 5635,3315 4730,3315 4720,3325 4720,3350
+5V on Bottom Layer (solid, remove dead copper, pour order 21): 5586.12,4071.12 5575,4060 5575,4004.1 5594.1,3985 5645,3985 5670,4010 5670,4060 5680,4070 5765,4070 5780,4085 5780,4160 5765,4175 5675,4175 5655,4155 5655,4100 5645,4090 5605,4090
+5V on Top Layer (solid, pour order 22): 5710,4100 5720,4090 5770,4090 5780,4100 5780,4155 5795,4170 5845,4170 5865,4190 5865,4230 5880,4245 5880,4720 5845,4755 5735,4755 5720,4740 5720,4690 5730,4700 5755,4700 5765,4690 5765,4739.03 5770.97,4745 5835,4745 5865,4715 5865,4250 5850,4235 5850,4195 5840,4185 5720,4185 5710,4175

## Keep-outs
Top Layer:
  region net "": 4780,4850 4975,4850 4975,5190 4780,5190
Bottom Layer:
  region net "": 4782.5,4850 4977.5,4850 4977.5,5190 4782.5,5190
Board Outline Layer:
  lines w10 net "": 3445,3418.11 ccw(c3563.11,3418.11) 3563.11,3300 6506.89,3300 ccw(c6506.89,3418.11) 6625,3418.11 6625,5266.89 ccw(c6506.89,5266.89) 6506.89,5385 3563.11,5385 ccw(c3563.11,5266.89) 3445,5266.89 3445,3418.11